# Altium PCB FPv1.3.1.PcbDoc (part 4 of 4)
Units mm, origin at the board's own origin, x right, y up, seen from the top; angles counter-clockwise.
Board outline 81.28 x 53.34 mm, 4 copper layers (Top Layer, GROUND PLANE, POWER PLANE, Bottom Layer); 98 components, 183 nets, 614 pads, 312 vias.
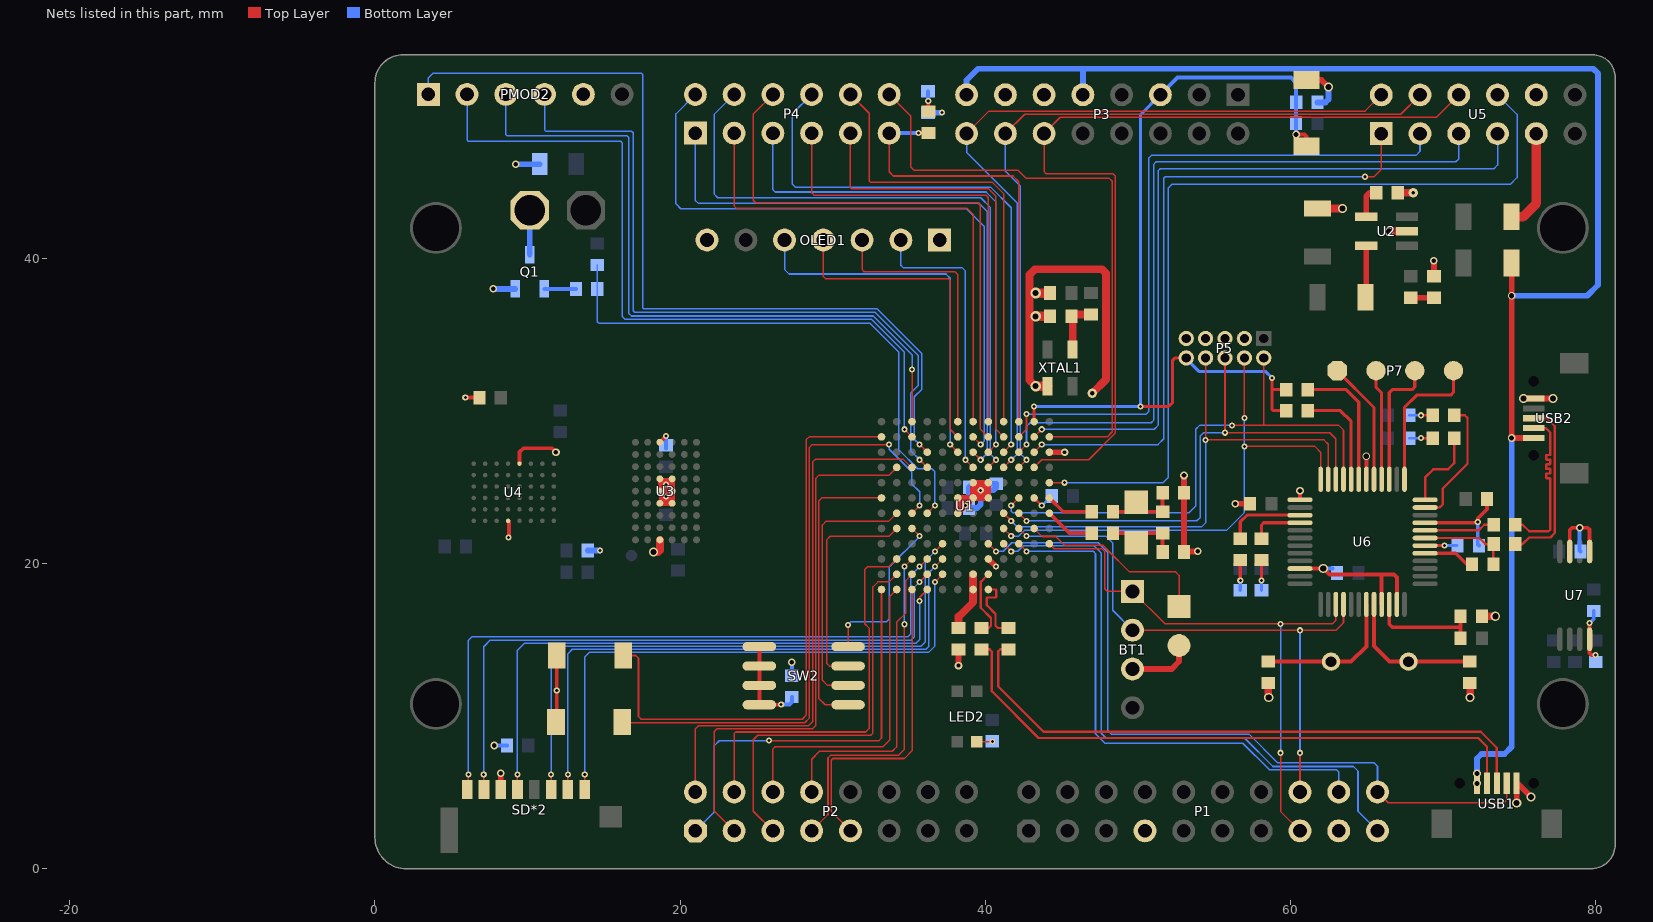
[diagram p6: the nets of this part, all layers, seen from the top]

## Via types
v1: diameter 0.403, hole 0.2, Top Layer to Bottom Layer, tented both sides, 261 vias
v2: diameter 0.503, hole 0.3, Top Layer to Bottom Layer, tented both sides, 25 vias
v3: diameter 0.6, hole 0.4, Top Layer to Bottom Layer, tented both sides, 11 vias
v4: diameter 0.508, hole 0.33, Top Layer to Bottom Layer, tented both sides, 5 vias
v5: diameter 0.703, hole 0.4, Top Layer to Bottom Layer, tented both sides, 3 vias
v6: diameter 0.603, hole 0.4, Top Layer to Bottom Layer, tented both sides, 2 vias
v7: diameter 0.503, hole 0.25, Top Layer to Bottom Layer, tented both sides, 2 vias
v8: diameter 0.6, hole 0.24, Top Layer to Bottom Layer, tented both sides, 1 vias
v9: diameter 0.508, hole 0.349, Top Layer to Bottom Layer, tented both sides, 1 vias
v10: diameter 0.603, hole 0.3, Top Layer to Bottom Layer, tented both sides, 1 vias

## Nets (pads, with @x,y where several pads share a name; then routed paths per layer and width w, separated by ;. In a path a pad name is that pad's centre, name@x,y a point inside that pad or via, vN(x,y) a via of type N, cw(c..) or ccw(c..) an arc to the next point about the centre after c; other vN are vias at no path point) (continued)
GND: BT1.3 C1.1 C2.1 C3.1 C4.1 C7.1 C8.2 C12.2 C13.1 C15.1 C16.1 C17.1 C18.1 C22.1 C24.2 C27.1 C28.1 C29.1 C32.2 C33.1 C34.1 C35.2 C36.1 C37.1 C38.1 OLED1.1 OLED1.7 P1.7 P1.17 P3.11 P3.13 P5.3 P5.5 P5.7 P5.9 P6.2 PMOD2.5 Q1.2 R6.1 R10.1 R30.1 R31.1 R34.1 S1.2 S2.2 S3.1 SD*2.6 U1.F6 U1.F7 U1.G7 U1.G8 U1.H3 U1.H7 U1.H8 U1.M10 U2.2 U3.A3 U3.D3 U3.D4 U3.E3 U3.E4 U3.F3 U3.F4 U3.J3 U4.D1 U4.E6 U5.9 U5.10 U6.9 U6.18 U6.25 U6.34 U6.45 U6.47 U7.5 U7.7 USB1.5 USB2.5 XTAL1.2 | length 133.7
  Top Layer w0.254: v1(5.925,30.875) C3.1@6.85,30.875 ; U4.E6@8.725,22.8 8.78,22.745 8.78,21.73 v1(8.75,21.7) ; U4.D1@9.475,26.55 9.475,27.304 9.726,27.556 11.611,27.556 v2(11.862,27.305) ; S2.2@11.916,9.675 S1.2@11.916,13.975 ; U3.F3@18.675,23.95 U3.F3@18.794,24.069 ; U3.D3@18.675,25.55 18.75,25.475 18.794,25.431 v1@19.075,25.15 ; U3.A3@18.675,27.95 v1(19.075,28.35) ; U3.E3@18.75,24.825 U3.E3@18.675,24.75 18.794,24.631 v1@19.075,24.35 ; U3.D4@19.356,25.431 U3.D4@19.475,25.55 ; U6.34@60.625,19.675 v3(62.15,19.675) 62.55,19.275 66.775,19.275 66.975,19.075 U6.47@66.975,17.325 ; U6.25@60.625,24.175 v2(60.625,24.775) ; U6.18@64.975,25.525 v9(64.975,27.025) ; U6.45@65.975,17.325 65.975,19.225 ; U6.9@68.825,22.675 72.25,22.675 72.275,22.7 v1(72.275,22.725) 72.275,22.948 72.887,23.561 C29.1@72.887,24.236 ; U7.7@78.304,20.791 78.304,22.204 78.45,22.35 v2(78.95,22.35) 79.475,22.35 79.604,22.221 U7.5@79.604,20.791
  Top Layer w0.381: SD*2.6@8.247,5.187 8.25,5.19 v2(8.25,6.25) v2@8.247,6.247 ; U3.F3@18.675,23.95 U3.F4@19.475,23.95 ; U3.D3@18.75,25.475 U3.E3@18.75,24.825 ; U3.E3@18.794,24.631 18.794,24.069 v1@19.075,24.35 ; U3.D3@18.794,25.431 19.356,25.431 v1@19.075,25.15 ; U3.D4@19.475,25.55 U3.E4@19.475,24.75 ; U1.F6@38.2,23.3 U1.F6@38.21,23.31 ; U1.F7@38.2,24.3 U1.F7@38.21,24.29 ; v7(38.25,13.312) R30.1@38.25,14.375 ; U1.H3@40.2,20.3 v1(40.7,19.8) ; U1.M10@44.2,27.3 v7(45.2,27.3) ; BT1.3@49.65,13.095 52.22,13.095 52.7,13.575 P6.2@52.7,14.635 ; v2(53.025,25.775) C38.1@53.025,20.765 53.06,20.8 v2(53.925,20.8) ; v2(56.375,23.925) C28.1@57.35,23.925 ; S3.1@61.05,51.691 62.025,51.691 v6(62.484,51.232) ; R31.1@69.4,38.825 v2(69.4,39.85) ; v3(74.825,4.3) USB1.5@74.825,5.6 ; USB1.5@74.875,5.6 v3(75.775,4.7) ; v3(75.275,30.825) USB2.5@75.95,30.825 v3(77.2,30.825) ; U3.E3@18.75,24.825 v1@19.075,25.15 ; U3.E3@18.75,24.825 18.825,24.75 U3.E4@19.475,24.75 ; v1@19.075,24.35 U3.E4@19.475,24.75 ; v1@19.075,24.35 U3.F4@19.475,23.95 ; v1@19.075,25.15 19.112,25.112 U3.E4@19.475,24.75 ; U3.F4@19.475,23.95 U3.E4@19.475,24.75 ; U1.F6@38.21,23.31 U1.F7@38.21,24.29 ; U1.F6@38.21,23.31 v1(38.7,23.8) ; U1.F7@38.21,24.29 U1.G7@39.19,24.29 ; U1.F7@38.21,24.29 v1(38.7,23.8) ; v1(38.7,23.8) U1.G7@39.19,24.29 ; U1.G7@39.19,24.29 U1.G7@39.2,24.3 ; U1.G7@39.19,24.29 39.2,24.29 U1.G7@39.2,24.3 ; U1.G7@39.2,24.3 U1.H7@40.2,24.3 ; U1.G7@39.2,24.3 U1.G8@39.2,25.3 ; U1.G7@39.2,24.3 v1(39.7,24.8) ; U1.G8@39.2,25.3 U1.H8@40.2,25.3 ; U1.G8@39.2,25.3 v1(39.7,24.8) ; v1(39.7,24.8) U1.H7@40.2,24.3 ; v1(39.7,24.8) U1.H8@40.2,25.3 ; U1.H7@40.2,24.3 U1.H8@40.2,25.3
  Top Layer w0.508: v3(18.25,20.75) 18.55,20.75 18.675,20.875 U3.J3@18.675,21.55 ; v5(43.3,31.625) 42.901,32.024 42.901,38.938 43.256,39.294 47.65,39.294 47.915,39.029 47.915,32.066 v10(47.015,31.166) ; C33.1@58.55,12.175 58.55,11.25 v3(58.575,11.225) ; C12.2@61.8,43.275 v3(63.4,43.275) ; v3(66.45,41.75) 66.475,41.775 U2.2@67.629,41.775 ; C13.1@67.025,44.3 v8(68.05,44.3) ; C35.2@71.75,12.175 71.775,12.15 v3(71.775,11.225) ; C24.2@72.55,16.55 v3(73.425,16.55)
  Top Layer w0.635: v5@42.977,37.725 C27.1@44.25,37.725 ; v5@43.002,36.2 C36.1@44.25,36.2 ; v5(43.3,31.625) XTAL1.2@44.074,31.625 ; C8.2@74.5,42.725 75.225,42.725 76.11,43.61 U5.9@76.11,48.175
  Bottom Layer w0.254: v2(7.825,8.075) C17.1@8.65,8.075 ; v1(19.075,25.175) v1@19.175,25.175 ; C15.1@19.075,27.55 v1(19.075,28.35) ; R6.1@27.325,12.65 v2(27.325,13.525) ; v3(62.15,19.675) C22.1@62.75,19.675 ; v1(72.275,22.725) 72.275,21.25 C32.2@72.35,21.175 ; v2(78.95,22.35) 78.95,20.845 C34.1@79.004,20.791
  Bottom Layer w0.381: v2(7.75,38) Q1.2@9.2,38 ; v2(9.225,46.175) C4.1@10.8,46.175 ; C16.1@13.95,20.85 v1@14.754,20.85 ; R34.1@36.25,49.55 v1@37.155,49.55 ; C2.1@39.121,24.8 v1(39.7,24.8) ; C7.1@61.775,50.225 62.29,50.225 62.484,50.419 v6(62.484,51.232) ; v1(39.7,24.8) 40.529,24.8 40.716,24.987 R10.1@40.716,25.236 39.17,25.236 C2.1@38.927,24.994 C1.1@38.927,23.647 39.472,23.647 39.7,23.876 v1(39.7,24.8)
  Bottom Layer w0.508: v1(19.075,24.4) v1@19.075,25.15
  other v1: 11.916,11.675 14.757,20.853 37.16,49.555
  other v5: 43.3,36.2 43.3,37.725
GPIOH0: P7.3 U6.15 | length 8.6
  Top Layer w0.203: U6.15@66.475,25.525 66.475,31.194 66.675,31.394 67.97,31.394 68.148,31.572 P7.3@68.148,32.639
GPIOH1: P7.4 U6.13 | length 9.8
  Top Layer w0.203: U6.13@67.475,25.525 67.475,30.239 68.275,31.039 70.51,31.039 70.688,31.217 P7.4@70.688,32.639
GPIOH2: L2.2 U6.12 | length 5.4
  Top Layer w0.152: U6.12@68.825,24.175 68.825,25.645 69.367,26.187 70.333,26.187 70.728,26.583 L2.2@70.728,28.219
GPIOH3: L6.2 U6.11 | length 8.5
  Top Layer w0.152: U6.11@68.825,23.675 69.776,23.675 69.977,23.876 69.977,24.917 71.603,26.543 71.603,29.54 71.425,29.718 L6.2@70.728,29.718
GPIOL0: R8.2 U6.20 | length 6.9
  Top Layer w0.203: R8.2@61.127,30.023 63.271,30.023 63.975,29.319 U6.20@63.975,25.525
GPIOL1: R11.2 U6.19 | length 8.7
  Top Layer w0.203: R11.2@61.127,31.394 63.652,31.394 64.475,30.572 U6.19@64.475,25.525
GPIOL2: P7.1 U6.17 | length 8.1
  Top Layer w0.203: P7.1@63.068,32.639 65.475,30.232 U6.17@65.475,25.525
GPIOL3: P7.2 U6.16 | length 7.3
  Top Layer w0.203: P7.2@65.608,32.639 65.608,31.547 65.975,31.18 U6.16@65.975,25.525
JTAG_TCK: P5.4 U1.J5 U6.24 | length 33.7
  Top Layer w0.102: U1.J5@41.2,22.3 v1(41.7,21.8) ; v1(56.98,27.675) 61.6,27.675 61.975,27.3 U6.24@61.975,25.525 ; v1(56.98,29.53) P5.4@56.98,33.48
  Bottom Layer w0.102: v1(41.7,21.8) 42.196,21.8 42.57,22.174 55.804,22.174 56.98,23.35 v1(56.98,27.675) v1(56.98,29.53)
JTAG_TDI: P5.8 U1.J6 U6.23 | length 35
  Top Layer w0.102: U1.J6@41.2,23.3 v1(41.7,22.8) ; P5.8@54.44,33.48 v1(54.44,28.1) 62.2,28.1 62.475,27.825 U6.23@62.475,25.525
  Bottom Layer w0.102: v1(41.7,22.8) 42.097,22.403 54.178,22.403 54.44,22.665 v1(54.44,28.1)
JTAG_TDO: P5.6 U1.K6 U6.22 | length 34.2
  Top Layer w0.102: U1.K6@42.2,23.3 v1(42.7,22.8) ; P5.6@55.71,33.48 v1(55.71,28.575) 62.575,28.575 62.975,28.175 U6.22@62.975,25.525
  Bottom Layer w0.102: v1(42.7,22.8) 53.864,22.8 54.086,23.022 54.086,28.356 54.305,28.575 v1(55.71,28.575) v1@55.725,28.575
JTAG_TMS: P5.2 U1.K7 U6.21 | length 36
  Top Layer w0.102: v1(41.7,23.8) U1.K7@42.2,24.3 ; v1(56.175,29.05) 58.25,29.05 ; P5.2@58.25,33.48 58.25,29.05 ; U6.21@63.475,25.525 63.475,28.75 63.175,29.05 58.25,29.05
  Bottom Layer w0.102: v1(41.7,23.8) 41.7,23.426 41.808,23.317 53.34,23.317 53.797,23.774 53.797,28.804 54.044,29.05 v1(56.175,29.05)
LPTMR0: P4.12 U1.M11 | length 39.6
  Top Layer w0.102: P4.12@33.701,50.745 35.125,49.321 35.125,45.975 35.325,45.775 42.15,45.775 42.688,45.237 48.133,45.237 48.322,45.049 48.322,28.634 47.988,28.3 U1.M11@44.2,28.3
N_RST: C7.2 P3.5 P5.10 R8.1 R11.1 R32.2 S3.2 U1.L12 | length 59.2
  Top Layer w0.203: U1.L12@43.2,29.3 v1(43.2,30.3) ; v1(50.175,30.3) 52.017,30.3 52.275,30.558 52.275,33.325 52.43,33.48 P5.10@53.17,33.48 ; 58.801,31.394 R11.1@59.727,31.394 ; v1(58.801,32.156) 58.801,30.099 58.877,30.023 R8.1@59.727,30.023
  Top Layer w0.254: v4(60.375,48.125) 60.925,48.125 61.05,48 S3.2@61.05,47.341
  Bottom Layer w0.203: v1(43.2,30.3) v1(50.175,30.3) 50.175,49.424 P3.5@51.476,50.725 ; P5.10@53.17,33.43 54,32.6 58.357,32.6 v1(58.801,32.156)
  Bottom Layer w0.254: P3.5@51.476,50.725 52.601,51.85 60.025,51.85 60.375,51.5 C7.2@60.375,50.225 v4(60.375,48.125)
NetC13_2: C13.2 U2.4 | length 1.7
  Top Layer w0.381: U2.4@64.971,42.725 64.971,44.071 65.2,44.3
NetC24_1: C24.1 R1.2 U6.46 | length 7.5
  Top Layer w0.254: U6.46@66.475,17.325 66.475,16.025 66.675,15.825 71.15,15.825 ; R1.2@71.15,15.1 C24.1@71.15,16.55
NetC32_1: C32.1 U6.6 | length 2.1
  Top Layer w0.203: U6.6@68.825,21.175 v1(70.1,21.175)
  Bottom Layer w0.203: v1(70.1,21.175) C32.1@70.925,21.175
NetC33_2: C33.2 U6.43 Y2.2 | length 9.6
  Top Layer w0.254: C33.2@58.55,13.575 63.975,13.575 64.975,14.575 U6.43@64.975,17.325
NetC35_1: C35.1 U6.44 Y2.1 | length 9.4
  Top Layer w0.254: U6.44@65.475,17.325 65.475,14.6 66.5,13.575 C35.1@71.75,13.575
NetC36_2: C36.2 FB2.2 XTAL1.4 | length 3.2
  Top Layer w0.508: XTAL1.4@45.725,34.025 C36.2@45.725,36.125 ; C36.2@45.775,36.325 FB2.2@46.925,36.325
NetC37_2: C37.2 R26.1 R27.1 Y1.1 | length 4.3
  Top Layer w0.254: R26.1@48.379,23.392 R27.1@51.424,23.392 ; R27.1@51.625,23.39 C37.2@51.625,24.64
NetC38_2: C38.2 R27.2 R28.1 Y1.2 | length 4.3
  Top Layer w0.254: R28.1@48.379,21.995 R27.2@51.427,21.995 ; C38.2@51.625,20.765 R27.2@51.625,21.99
NetF2_1: F2.1 U2.5 | length 3.4
  Top Layer w0.381: F2.1@64.971,37.45 U2.5@64.971,40.825
NetL1_2: L1.2 R34.2 | length 1.3
  Top Layer w0.254: L1.2@36.263,49.638 v1@36.263,50.288
  Bottom Layer w0.102: v1@36.25,50.326 v1(36.263,50.313)
  Bottom Layer w0.254: v1@36.25,50.326 R34.2@36.25,50.95
NetL2_1: L2.1 R12.1 | length 1.5
  Top Layer w0.152: v1(68.555,28.219) L2.1@69.328,28.219
  Bottom Layer w0.152: R12.1@67.781,28.219 v1(68.555,28.219)
NetL3_2: L3.2 R31.2 | length 1.5
  Top Layer w0.381: L3.2@67.875,37.425 R31.2@69.4,37.425
NetL4_1: L4.1 R18.1 | length 2
  Top Layer w0.203: v1(58.1,18.9) L4.1@58.1,20.225
  Bottom Layer w0.203: R18.1@58.1,18.247 v1(58.1,18.9)
NetL5_1: L5.1 R19.1 | length 2
  Top Layer w0.203: L5.1@56.709,20.229 56.709,18.931 v1@56.74,18.9
  Bottom Layer w0.203: R19.1@56.709,18.251 v1@56.709,18.896 ; v1(56.711,18.899) 56.713,18.9 v1@56.74,18.9
NetL6_1: L6.1 R13.1 | length 1.5
  Top Layer w0.152: v1(68.555,29.718) L6.1@69.328,29.718
  Bottom Layer w0.152: R13.1@67.781,29.718 v1(68.555,29.718)
NetLED2_2: LED2.2 R7.1 | length 1
  Top Layer w0.102: LED2.2@39.435,8.324 v1@40.462,8.324
  other v1: 40.462,8.331
NetLS2_2: LS2.2 Q1.1 | length 2.9
  Bottom Layer w0.381: Q1.1@10.15,40.25 LS2.2@10.149,43.15
NetQ1_2: Q1.3 R5.1 | length 2.1
  Bottom Layer w0.254: Q1.3@11.1,38 R5.1@13.175,38
NetR6_2: R6.2 SW2.1 SW2.2 SW2.3 SW2.4 | length 6.3
  Top Layer w0.254: SW2.1@25.192,14.555 SW2.2@25.192,13.285 SW2.3@25.192,12.015 SW2.4@25.192,10.745 v1@26.595,10.745
  Bottom Layer w0.254: v1(26.625,10.775) 27.175,10.775 27.325,10.925 R6.2@27.325,11.25
NetR22_2: R22.2 R25.2 U7.4 | length 3.3
  Top Layer w0.254: v1(79.6,16.1) 79.604,16.096 U7.4@79.604,15.041 79.604,14.121 79.725,14 v1(80,14)
  Bottom Layer w0.254: v1(79.6,16.1) 79.875,16.375 R25.2@79.875,16.9
NetR29_2: R29.2 U6.5 | length 3.4
  Top Layer w0.203: U6.5@68.825,20.675 70.825,20.675 71.55,19.95 R29.2@71.9,19.95
NetR30_2: R30.2 U1.G1 U1.G2 | length 3.9
  Top Layer w0.508: R30.2@38.25,15.775 38.25,16.525 39.2,17.475 U1.G1@39.2,18.3 U1.G2@39.2,19.3
PTA4: R9.2 U1.L7 | length 1.6
  Top Layer w0.152: U1.L7@43.2,24.3 v1(43.7,23.8)
  Bottom Layer w0.152: v1(43.7,23.8) 43.725,23.8 R9.2@44.35,24.425
PTA5: U1.M8 U5.8 | length 56
  Top Layer w0.102: U1.M8@44.2,25.3 v1(45.2,25.3)
  Bottom Layer w0.102: v1(45.2,25.3) 51.64,25.3 52,25.66 52,44.625 52.225,44.85 74.4,44.85 74.85,45.3 74.85,49.435 U5.8@73.57,50.715
PTA11: P3.12 U1.L9 U5.6 | length 58.6
  Top Layer w0.102: U1.L9@43.2,26.3 43.7,26.8 46.775,26.8 48.525,28.55 48.525,45.4 48.375,45.55 44,45.55 43.856,45.694 P3.12@43.856,48.185 44.921,49.25 69.565,49.25 U5.6@71.03,50.715
PTA12: P3.14 U1.K9 U5.4 | length 50.9
  Top Layer w0.102: P3.14@41.316,48.185 42.584,49.453 67.228,49.453 U5.4@68.49,50.715 ; U1.K9@42.2,26.3 v1(42.7,26.8)
  Bottom Layer w0.102: P3.14@41.316,48.185 41.316,45.725 42.291,44.75 42.291,27.209 v1(42.7,26.8)
PTA13: P3.16 U1.J9 U5.2 | length 51.8
  Top Layer w0.102: P3.16@38.776,48.185 40.247,49.656 64.891,49.656 U5.2@65.95,50.715 ; U1.J9@41.2,26.3 v1(41.7,26.8)
  Bottom Layer w0.102: P3.16@38.776,48.185 38.776,46.949 42.088,43.637 42.088,27.188 v1(41.7,26.8)
PTA14: U1.L10 U5.1 | length 42.8
  Top Layer w0.102: U1.L10@43.2,27.3 v1(43.7,27.8) ; v1(64.875,45.35) 65.475,45.35 65.95,45.825 U5.1@65.95,48.175
  Bottom Layer w0.102: v1(43.7,27.8) 51.325,27.8 51.7,28.175 51.7,45.248 51.802,45.35 v1(64.875,45.35)
PTA15: U1.L11 U5.7 | length 49.6
  Top Layer w0.102: U1.L11@43.2,28.3 v1(43.7,28.8)
  Bottom Layer w0.102: v1(43.7,28.8) 51.076,28.8 51.35,29.074 51.35,45.762 51.463,45.875 73.332,45.875 73.57,46.113 U5.7@73.57,48.175
PTA16: U1.K10 U5.5 | length 49
  Top Layer w0.102: U1.K10@42.2,27.3 v1(42.7,27.8)
  Bottom Layer w0.102: v1(42.7,27.8) 42.7,28.984 42.951,29.235 50.876,29.235 51.054,29.413 51.054,46.177 51.202,46.325 70.836,46.325 71.03,46.519 U5.5@71.03,48.175
PTA17: U1.K11 U5.3 | length 45.5
  Top Layer w0.102: U1.K11@42.2,28.3 42.7,28.8 v1(42.7,29.8)
  Bottom Layer w0.102: v1(42.7,29.8) 50.552,29.8 50.7,29.948 50.7,46.56 50.89,46.75 68.225,46.75 68.49,47.015 U5.3@68.49,48.175
PTA24: L1.1 P4.11 U1.K12 | length 29.6
  Top Layer w0.102: P4.11@33.701,48.205 33.701,45.674 33.975,45.4 41.825,45.4 42.2,45.025 U1.K12@42.2,29.3
  Top Layer w0.254: v1(35.625,48.225) L1.1@36.275,48.225
  Bottom Layer w0.254: P4.11@33.701,48.205 v1@35.605,48.205
PTA25: P4.10 U1.J12 | length 30.3
  Top Layer w0.102: P4.10@31.161,50.745 32.4,49.506 32.4,45.075 32.5,44.975 40.475,44.975 41.2,44.25 U1.J12@41.2,29.3
PTA26: P4.9 U1.J11 | length 29.3
  Top Layer w0.102: P4.9@31.161,48.205 31.161,44.633 31.244,44.55 40.225,44.55 40.7,44.075 40.7,28.8 U1.J11@41.2,28.3
PTA27: P4.8 U1.J10 | length 37.6
  Top Layer w0.102: U1.J10@41.2,27.3 v1(41.7,27.8)
  Bottom Layer w0.102: P4.8@28.621,50.745 27.35,49.474 27.35,44.875 27.55,44.675 40.35,44.675 41.7,43.325 v1(41.7,27.8)
PTA28: P4.7 U1.H12 | length 30.3
  Top Layer w0.102: P4.7@28.621,48.205 28.621,44.304 28.775,44.15 40.025,44.15 40.2,43.975 U1.H12@40.2,29.3
PTA29: P4.6 U1.H11 | length 37.9
  Top Layer w0.102: P4.6@26.081,50.745 24.8,49.464 24.8,43.805 24.955,43.65 39.5,43.65 39.675,43.475 39.675,28.825 U1.H11@40.2,28.3
PTB0: P4.5 U1.H10 | length 35.3
  Top Layer w0.102: U1.H10@40.2,27.3 v1(40.7,27.8)
  Bottom Layer w0.102: P4.5@26.081,48.205 26.081,44.494 26.225,44.35 40.05,44.35 40.7,43.7 v1(40.7,27.8)
PTB1: P4.4 U1.H9 | length 42.9
  Top Layer w0.102: U1.H9@40.2,26.3 v1(40.7,26.8)
  Bottom Layer w0.102: P4.4@23.541,50.745 22.225,49.429 22.225,44.225 22.475,43.975 39.7,43.975 40.335,43.34 40.335,27.165 v1(40.7,26.8)
PTB2: P4.3 U1.G12 | length 34.2
  Top Layer w0.102: P4.3@23.541,48.205 23.541,43.439 23.705,43.275 38.825,43.275 39.2,42.9 U1.G12@39.2,29.3
PTB3: P4.2 U1.G11 | length 43.6
  Top Layer w0.102: U1.G11@39.2,28.3 v1(39.7,27.8)
  Bottom Layer w0.102: P4.2@21.001,50.745 19.725,49.469 19.725,43.575 20.05,43.25 38.775,43.25 39.929,42.096 39.929,28.029 v1(39.7,27.8)
PTB4: P4.1 U1.G10 | length 41
  Top Layer w0.102: U1.G10@39.2,27.3 v1(39.7,26.8)
  Bottom Layer w0.102: P4.1@21.001,48.205 21.001,43.799 21.2,43.6 39.6,43.6 40.132,43.068 40.132,27.232 v1(39.7,26.8)
PTB5: OLED1.2 U1.G9 | length 19.1
  Top Layer w0.102: v1(38.7,26.8) U1.G9@39.2,26.3
  Bottom Layer w0.102: OLED1.2@34.468,41.199 34.468,39.548 34.616,39.4 38.475,39.4 38.7,39.175 v1(38.7,26.8)
PTB6: OLED1.3 U1.F12 | length 18
  Top Layer w0.102: OLED1.3@31.928,41.199 31.928,39.268 32.071,39.125 38.015,39.125 38.2,38.94 U1.F12@38.2,29.3
PTB7: OLED1.4 U1.F11 | length 21.3
  Top Layer w0.102: OLED1.4@29.388,41.199 29.388,38.811 29.524,38.675 37.576,38.675 37.7,38.551 37.7,28.8 U1.F11@38.2,28.3
PTB8: OLED1.5 U1.F10 | length 24.6
  Top Layer w0.102: v1(37.7,27.8) U1.F10@38.2,27.3
  Bottom Layer w0.102: OLED1.5@26.848,41.199 26.848,39.268 27.141,38.975 37.428,38.975 37.7,38.703 v1(37.7,27.8)
PTB20: PMOD2.1 U1.D10 | length 57.1
  Top Layer w0.102: v1(35.7,27.8) U1.D10@36.2,27.3
  Bottom Layer w0.102: PMOD2.1@3.5,50.75 3.5,51.825 3.8,52.125 17.471,52.125 17.55,52.046 17.55,36.755 17.605,36.7 32.896,36.7 35.846,33.75 35.846,31.426 35.346,30.926 35.346,28.154 v1(35.7,27.8)
PTB21: PMOD2.4 U1.D9 | length 47.7
  Top Layer w0.102: v1(35.7,26.8) U1.D9@36.2,26.3
  Bottom Layer w0.102: PMOD2.4@11.12,50.75 11.12,48.418 11.209,48.328 16.823,48.328 16.925,48.226 16.925,36.567 17.017,36.475 32.765,36.475 35.6,33.64 35.6,31.663 35.128,31.191 35.128,27.372 v1(35.7,26.8)
PTB22: PMOD2.3 U1.C12 | length 46.4
  Top Layer w0.102: U1.C12@35.2,29.3 v1(35.2,32.72)
  Bottom Layer w0.102: PMOD2.3@8.58,50.75 8.58,48.113 8.668,48.025 16.542,48.025 16.625,47.942 16.625,36.41 16.81,36.225 32.66,36.225 35.2,33.685 v1(35.2,32.72)
PTB23: PMOD2.2 U1.C11 | length 49.8
  Top Layer w0.102: v1(34.7,28.8) U1.C11@35.2,28.3
  Bottom Layer w0.102: PMOD2.2@6.04,50.75 6.04,47.757 6.122,47.675 16.104,47.675 16.2,47.579 16.2,36.2 16.4,36 32.555,36 34.7,33.855 v1(34.7,28.8)
PTC3: S1.1 U1.A11 | length 39.1
  Top Layer w0.102: S1.1@16.266,13.975 17.1,13.975 17.275,13.8 17.275,9.975 17.45,9.8 28,9.8 28.275,10.075 28.275,28.123 28.452,28.3 U1.A11@33.2,28.3
PTC12: SW2.5 U1.A7 | length 19.2
  Top Layer w0.102: SW2.5@31.008,10.745 29.505,10.745 29.088,11.162 29.088,24.103 29.285,24.3 U1.A7@33.2,24.3
PTC13: R4.2 R5.2 U1.D6 | length 36.6
  Top Layer w0.102: U1.D6@36.2,23.3 v1(36.7,23.8)
  Bottom Layer w0.102: R4.2@14.575,39.575 14.575,35.844 14.681,35.738 32.461,35.738 34.315,33.884 34.315,27.472 35.575,26.213 36.5,26.213 36.7,26.013 v1(36.7,23.8)
PTC14: S2.1 U1.C6 | length 41
  Top Layer w0.102: S2.1@16.216,9.572 28.172,9.572 28.478,9.878 28.478,27.615 28.664,27.8 v1(33.7,27.8) v1@33.706,27.8 ; U1.C6@35.2,23.3 v1(35.7,23.8)
  Bottom Layer w0.102: v1(33.7,27.8) 33.7,27.489 35.179,26.01 35.179,25.222 35.7,24.701 v1(35.7,23.8)
PTC15: SW2.6 U1.B6 | length 17.2
  Top Layer w0.102: SW2.6@31.008,12.015 29.66,12.015 29.325,12.35 29.325,22.53 29.579,22.784 33.684,22.784 U1.B6@34.2,23.3
PTC18: SW2.8 U1.C5 | length 11.3
  Top Layer w0.102: SW2.8@31.008,14.555 v1(31.008,15.982) ; U1.C5@35.2,22.3 v1(35.7,21.8)
  Bottom Layer w0.102: v1(31.008,15.982) 31.223,16.197 33.545,16.197 33.706,16.358 33.706,19.787 35.7,21.781 v1(35.7,21.8)
PTC19: SW2.7 U1.B5 | length 14.5
  Top Layer w0.102: SW2.7@31.008,13.285 29.79,13.285 29.6,13.475 29.6,21.547 29.846,21.793 33.693,21.793 U1.B5@34.2,22.3
PTD7: P2.1 U1.A1 | length 27
  Top Layer w0.102: v1(25.832,8.396) 33.034,8.396 33.2,8.562 U1.A1@33.2,18.3
  Bottom Layer w0.102: P2.1@21.001,2.485 22.25,3.734 22.25,8.077 22.569,8.396 v1(25.832,8.396)
PTD8: P2.2 U1.C9 | length 35.8
  Top Layer w0.102: P2.2@21.001,5.025 21.001,9.165 21.205,9.369 28.419,9.369 28.681,9.631 28.681,26.649 28.857,26.825 34.638,26.825 35.163,26.3 U1.C9@35.2,26.3
PTD9: P2.3 U1.B9 | length 35.7
  Top Layer w0.102: P2.3@23.541,2.485 22.25,3.776 22.25,9.017 22.399,9.165 28.665,9.165 28.885,9.385 28.885,25.583 29.077,25.775 33.675,25.775 U1.B9@34.2,26.3
PTD10: P2.4 U1.B3 | length 25.7
  Top Layer w0.102: P2.4@23.541,5.025 23.541,8.86 23.643,8.962 32.162,8.962 32.385,9.185 32.385,15.773 32.107,16.051 32.107,19.61 32.297,19.8 33.7,19.8 U1.B3@34.2,20.3
PTD11: P2.5 U1.B2 | length 26
  Top Layer w0.102: P2.5@26.081,2.485 24.79,3.776 24.79,8.458 25.082,8.75 32.499,8.75 32.639,8.89 32.639,18.466 32.969,18.796 33.696,18.796 U1.B2@34.2,19.3
PTD12: P2.6 U1.B1 | length 20.8
  Top Layer w0.102: P2.6@26.081,5.025 26.081,7.844 26.237,8 33.298,8 33.744,8.445 33.744,17.844 U1.B1@34.2,18.3
PTD13: P2.7 U1.C3 | length 23.1
  Top Layer w0.102: P2.7@28.621,2.485 29.693,3.557 29.693,7.264 29.856,7.428 34.29,7.428 34.7,7.838 v1(34.7,16.024) ; v1(34.7,19.8) U1.C3@35.2,20.3
  Bottom Layer w0.102: v1(34.7,16.024) v1(34.7,19.8)
PTD14: P2.8 U1.C2 | length 19.8
  Top Layer w0.102: P2.8@28.621,5.025 28.621,7.183 29.134,7.696 33.909,7.696 34.188,7.976 34.188,16.154 34.798,16.764 34.798,18.898 U1.C2@35.2,19.3
PTD15: P2.9 U1.C1 | length 21.3
  Top Layer w0.102: P2.9@31.161,2.485 29.9,3.746 29.9,7.116 30.009,7.225 34.7,7.225 35.2,7.725 U1.C1@35.2,18.3
PTE0: SD*2.8 U1.D3 | length 44.2
  Top Layer w0.102: SD*2.8@6.125,5.265 v1(6.125,6.175) ; v1(35.7,19.8) U1.D3@36.2,20.3
  Bottom Layer w0.102: v1(6.125,6.175) 6.125,14.975 6.341,15.191 34.927,15.191 35.103,15.367 35.103,19.203 v1(35.7,19.8)
PTE1: SD*2.7 U1.D2 | length 42.4
  Top Layer w0.102: SD*2.7@7.129,5.205 v1(7.129,6.175) ; v1(35.7,18.8) U1.D2@36.2,19.3
  Bottom Layer w0.102: v1@7.125,6.325 v1@7.129,6.321 ; v1(7.129,6.175) v1@7.129,6.321 ; v1@35.8,18.9 35.331,18.431 35.331,15.168 35.151,14.988 7.563,14.988 7.129,14.554 v1@7.129,6.321
PTE2: SD*2.5 U1.D1 | length 39.3
  Top Layer w0.102: SD*2.5@9.336,5.198 v1(9.336,6.175) ; v1(35.7,17.551) 35.7,17.8 U1.D1@36.2,18.3
  Bottom Layer w0.102: v1(9.336,6.175) 9.336,14.311 9.81,14.785 35.46,14.785 35.7,15.024 v1(35.7,17.551)
PTE3: SD*2.3 U1.E4 | length 40.6
  Top Layer w0.102: SD*2.3@11.543,5.191 v1(11.543,6.175) ; v1(36.7,20.8) U1.E4@37.2,21.3
  Bottom Layer w0.102: v1(11.543,6.175) 11.543,14.293 11.831,14.581 35.79,14.581 36.068,14.859 36.068,20.168 v1@36.6,20.7
PTE4: SD*2.2 U1.E3 | length 38.9
  Top Layer w0.102: SD*2.2@12.647,5.187 v1(12.646,6.175) ; v1(36.7,19.8) U1.E3@37.2,20.3
  Bottom Layer w0.102: v1(12.646,6.175) 12.646,14.096 12.928,14.378 36.117,14.378 36.297,14.557 36.297,19.397 v1(36.7,19.8)
PTE5: SD*2.1 U1.E2 | length 36.8
  Top Layer w0.102: SD*2.1@13.75,5.19 v1(13.75,6.175) ; v1(36.7,18.8) U1.E2@37.2,19.3
  Bottom Layer w0.102: v1(13.75,6.175) 13.75,13.875 14.05,14.175 36.273,14.175 36.7,14.602 v1(36.7,18.8)
PTE24: BT1.1 P1.15 U1.M4 U6.39 | length 37.6
  Top Layer w0.102: U1.M4@44.2,21.3 44.522,20.978 47.647,20.978 47.829,20.796 47.829,18.346 48,18.175 BT1.1@49.65,18.175 51.775,16.05 62.75,16.05 62.975,16.275 U6.39@62.975,17.325 ; v1(59.35,7.6) 59.35,3.76 P1.15@60.625,2.485
  Bottom Layer w0.102: v1(59.35,7.6) v1(59.35,16.05)
PTE25: BT1.2 P1.16 U1.K5 U6.40 | length 38.7
  Top Layer w0.102: U1.K5@42.2,22.3 v1(42.7,21.8) ; BT1.2@49.65,15.46 49.825,15.635 62.985,15.635 63.475,16.125 U6.40@63.475,17.325 ; P1.16@60.625,5.025 v1(60.625,7.6)
  Bottom Layer w0.102: v1(42.7,21.8) 47.898,21.8 48.35,21.348 48.35,16.935 BT1.2@49.65,15.635 ; v1(60.625,7.6) v1(60.625,15.625)
PTE26: P1.18 U1.K4 | length 35.4
  Top Layer w0.102: U1.K4@42.2,21.3 v1(42.7,20.8)
  Bottom Layer w0.102: v1(42.7,20.8) 47.081,20.8 47.225,20.656 47.225,8.85 47.85,8.225 56.875,8.225 58.603,6.497 63.003,6.497 63.165,6.335 P1.18@63.165,5.025
PTE27: P1.19 U1.J4 | length 41.1
  Top Layer w0.102: U1.J4@41.2,21.3 v1(41.7,20.8)
  Bottom Layer w0.102: v1(41.7,20.8) 42.136,20.8 42.49,21.154 47.138,21.154 47.6,20.692 47.6,8.875 47.925,8.55 57,8.55 58.85,6.7 64.125,6.7 64.425,6.4 64.425,3.765 P1.19@65.705,2.485
PTE28: P1.20 U1.H4 USB1.4 | length 51.2
  Top Layer w0.102: U1.H4@40.2,21.3 v1(40.7,20.8) ; P1.20@65.705,5.025 66.405,4.325 74,4.325 74.175,4.5 USB1.4@74.175,5.6 ; USB1.4@74.15,5.6 74.15,6.3
  Bottom Layer w0.102: v1(40.7,20.8) 41.171,20.8 41.728,21.357 47.401,21.357 48.025,20.733 48.025,9.05 48.25,8.825 57.275,8.825 59.15,6.95 65.475,6.95 65.705,6.72 P1.20@65.705,5.025
RTC_WAKE: P6.1 U1.L5 | length 12.8
  Top Layer w0.102: U1.L5@43.2,22.3 43.725,21.775 44.625,21.775 45.2,21.2 47.712,21.2 48.032,20.88 48.032,20.868 49.425,19.475 52.45,19.475 52.7,19.225 P6.1@52.7,17.175
RTCX1: R28.2 U1.M6 | length 3.3
  Top Layer w0.254: U1.M6@44.2,23.3 45.505,21.995 R28.2@46.979,21.995
RTCX2: R26.2 U1.M7 | length 3.2
  Top Layer w0.254: U1.M7@44.2,24.3 45.108,23.392 R26.2@46.979,23.392
RXD_LED: L4.2 U6.28 | length 3.5
  Top Layer w0.203: L4.2@58.1,21.625 58.1,22.525 58.25,22.675 U6.28@60.625,22.675
TXD_LED: L5.2 U6.27 | length 5.2
  Top Layer w0.203: L5.2@56.709,21.629 56.709,22.734 57.15,23.175 U6.27@60.625,23.175
USB0D_N: R20.2 U6.8 | length 4.7
  Top Layer w0.152: U6.8@68.825,22.175 72.325,22.175 72.7,22.55 R20.2@73.325,22.55
  Top Layer w0.203: R20.2@73.275,22.55 R20.2@73.325,22.5
USB0D_P: R21.2 R29.1 U6.7 | length 6
  Top Layer w0.152: U6.7@68.825,21.675 72.375,21.675 72.775,21.275 R21.2@73.325,21.275 ; R21.2@73.3,21.25 R29.1@73.3,19.95 R29.1@73.325,19.975
USB0R_N: R20.1 USB2.2 | length 11.4
  Top Layer w0.152: R20.1@74.725,22.55 75.212,22.55 75.646,22.116 76.916,22.116 77.02,22.22 77.02,25.55 77.02,25.563 ccw(c76.99,25.563) 76.99,25.594 76.797,25.594 cw(c76.797,25.624) 76.766,25.624 76.766,25.868 cw(c76.797,25.868) 76.797,25.899 76.99,25.899 ccw(c76.99,25.929) 77.02,25.929 77.02,26.173 ccw(c76.99,26.173) 76.99,26.203 76.797,26.203 cw(c76.797,26.234) 76.766,26.234 76.766,26.478 cw(c76.797,26.478) 76.797,26.508 76.99,26.508 ccw(c76.99,26.539) 77.02,26.539 77.02,26.783 ccw(c76.99,26.783) 76.99,26.813 76.797,26.813 cw(c76.797,26.843) 76.766,26.843 76.766,27.087 cw(c76.797,27.087) 76.797,27.118 76.99,27.118 ccw(c76.99,27.148) 77.02,27.148 77.02,27.423 77.02,27.575 77.02,28.58 76.725,28.875 USB2.2@75.95,28.875
USB0R_P: R21.1 USB2.3 | length 11.5
  Top Layer w0.152: R21.1@74.725,21.275 75.212,21.275 75.646,21.709 77.034,21.709 77.325,22 77.325,29 76.8,29.525 USB2.3@75.95,29.525
USB1D_N: R2.1 U1.H2 | length 4.5
  Top Layer w0.152: R2.1@39.75,15.775 40.225,15.775 40.375,15.925 40.375,16.425 39.7,17.1 39.7,18.8 U1.H2@40.2,19.3
USB1D_P: R3.1 U1.H1 | length 4.6
  Top Layer w0.152: U1.H1@40.2,18.3 40.675,18.3 40.725,18.25 40.725,17.825 40.675,17.775 40.15,17.775 40.106,17.731 40.106,17.269 40.675,16.7 40.675,15.925 40.825,15.775 R3.1@41.525,15.775
USBPD_N: R2.2 USB1.2 | length 39.7
  Top Layer w0.152: R2.2@39.75,14.375 40.285,14.375 40.434,14.226 40.434,11.632 43.497,8.569 72.307,8.569 72.875,8 USB1.2@72.875,5.6
USBPD_P: R3.2 USB1.3 | length 39.7
  Top Layer w0.152: R3.2@41.525,14.375 40.985,14.375 40.841,14.23 40.841,11.959 43.825,8.975 72.475,8.975 73.525,7.925 USB1.3@73.525,5.6
VCC: F1.1 P3.9 P3.15 USB1.1 USB2.1 | length 101.6
  Top Layer w0.381: F1.1@74.5,39.7 v4(74.5,28.225) USB2.1@75.95,28.225
  Bottom Layer w0.381: P3.15@38.776,50.725 38.776,51.676 39.525,52.425 79.85,52.425 80.15,52.125 80.15,38.25 79.45,37.55 v4(74.5,37.55) ; P3.9@46.396,50.725 46.396,52.396 ; v4(72.225,5.6) v4(72.225,6.25) 72.225,7.225 72.525,7.525 74.025,7.525 74.5,8 v4(74.5,28.225)
pads on no net: P3.1 SD*2.0 U1.A10 U1.B10 U1.C10 U1.M5 U3.A2 U3.A5 U3.B3 U3.B4 U3.H3 U3.H4 U3.J2 U3.J5 U4.E3 U4.H6 U6.29 U6.30 U6.32 U6.33 U6.35 U6.36 U6.37 U6.38 U6.41 USB1.0 USB1.6 USB1.7 USB2.0 USB2.4 USB2.6 USB2.7 XTAL1.1

## Polygon pours and split planes (outlines as drawn)
GND on GROUND PLANE (split plane): 1.84,52.83 79.81,52.83 79.822,52.831 79.936,52.823 80.059,52.799 80.178,52.758 80.291,52.703 80.395,52.633 80.49,52.55 80.573,52.455 80.643,52.351 80.698,52.238 80.739,52.119 80.763,51.996 80.771,51.882 80.77,51.87 80.77,1.58 80.771,1.567 80.763,1.44 80.735,1.303 80.69,1.17 80.628,1.044 80.55,0.928 80.458,0.822 80.352,0.73 80.236,0.652 80.11,0.59 79.977,0.545 79.84,0.517 79.713,0.509 79.7,0.51 2.05,0.51 2.035,0.509 1.877,0.518 1.707,0.547 1.541,0.595 1.381,0.661 1.23,0.744 1.089,0.845 0.96,0.96 0.845,1.089 0.744,1.23 0.661,1.381 0.595,1.541 0.547,1.707 0.518,1.877 0.509,2.035 0.51,2.05 0.51,51.5 0.509,51.513 0.517,51.649 0.542,51.796 0.583,51.94 0.64,52.078 0.713,52.208 0.799,52.33 0.898,52.442 1.01,52.541 1.132,52.627 1.262,52.7 1.4,52.757 1.544,52.798 1.691,52.823 1.827,52.831
3.3V on POWER PLANE (split plane): 1.84,52.83 79.81,52.83 79.822,52.831 79.936,52.823 80.059,52.799 80.178,52.758 80.291,52.703 80.395,52.633 80.49,52.55 80.573,52.455 80.643,52.351 80.698,52.238 80.739,52.119 80.763,51.996 80.771,51.882 80.77,51.87 80.77,1.58 80.771,1.567 80.763,1.44 80.735,1.303 80.69,1.17 80.628,1.044 80.55,0.928 80.458,0.822 80.352,0.73 80.236,0.652 80.11,0.59 79.977,0.545 79.84,0.517 79.713,0.509 79.7,0.51 2.05,0.51 2.035,0.509 1.877,0.518 1.707,0.547 1.541,0.595 1.381,0.661 1.23,0.744 1.089,0.845 0.96,0.96 0.845,1.089 0.744,1.23 0.661,1.381 0.595,1.541 0.547,1.707 0.518,1.877 0.509,2.035 0.51,2.05 0.51,51.5 0.509,51.513 0.517,51.649 0.542,51.796 0.583,51.94 0.64,52.078 0.713,52.208 0.799,52.33 0.898,52.442 1.01,52.541 1.132,52.627 1.262,52.7 1.4,52.757 1.544,52.798 1.691,52.823 1.827,52.831

## Keep-outs
Keep-Out Layer:
  the board outline again, w0.254

## Other copper
Top Layer:
  rectangle net 3.3V: 60.884,36.576 62.636,40.615
  rectangle net 3.3V: 37.2,22.306 37.7,25.3
  rectangle net 3.3V: 37.2,25.07 37.97,25.3
  rectangle net GND: 39.2,24.3 40.2,25.3
  rectangle net GND: 38.21,23.724 40.03,24.841
Bottom Layer:
  rectangle net GND: 38.837,24.8 40.529,25.248
  rectangle net 3.3V: 37.135,21.565 37.922,24.562
  rectangle net 3.3V: 37.135,21.514 38.456,22.428
  rectangle net GND: 38.532,23.647 39.7,24.663

## Silkscreen, mask and mechanical layers (free items; w line width, h text height)
Top Overlay:
  drawing of 2913 lines, arcs and shapes, not listed
  text "GND" at 63.2,51.2 h0.51 r90
  text ">" at 36.013,48.838 h0.76 r270
  text "B20" at 2.769,48.209 h1.02
  text "B23" at 5.339,48.209 h1.02
  text "B22" at 7.91,48.209 h1.02
  text "B21" at 10.48,48.209 h1.02
  text "GND" at 13.051,48.213 h1.02
  text "3V3" at 15.621,48.213 h1.02
  text "RST" at 63.2,47.05 h0.51 r90
  text "A13" at 65.253,46.025 h1.02
  text "A12" at 67.828,46.021 h1.02
  text "A11" at 70.404,46.025 h1.02
  text "A5" at 72.98,46.025 h1.02
  text "GND" at 75.555,46.025 h1.02
  text "3V3" at 78.13,46.025 h1.02
  text "B3" at 20.371,45.775 h1.02
  text "B1" at 22.939,45.776 h1.02
  text "A29" at 25.507,45.771 h1.02
  text "A27" at 28.076,45.771 h1.02
  text "A25" at 30.644,45.771 h1.02
  text "A19" at 33.212,45.772 h1.02
  text "VCC" at 38,45.772 h1.02
  text "GND" at 40.641,45.772 h1.02
  text "GND" at 43.283,45.772 h1.02
  text "VCC" at 45.924,45.772 h1.02
  text "3V3" at 48.565,45.772 h1.02
  text "RST" at 51.207,45.772 h1.02
  text "3V3" at 53.848,45.772 h1.02
  text "NC" at 56.49,45.772 h1.02
  text "A14" at 65.253,45.009 h1.02
  text "A17" at 67.828,45.009 h1.02
  text "A16" at 70.404,45.009 h1.02
  text "A15" at 72.98,45.009 h1.02
  text "GND" at 75.555,45.009 h1.02
  text "3V3" at 78.13,45.009 h1.02
  text "B4" at 20.371,44.557 h1.02
  text "B2" at 22.931,44.552 h1.02
  text "B0" at 25.491,44.553 h1.02
  text "A28" at 28.052,44.552 h1.02
  text "A26" at 30.612,44.552 h1.02
  text "A24" at 33.172,44.552 h1.02
  text "A13" at 38.028,44.558 h1.02
  text "A12" at 40.66,44.552 h1.02
  text "A11" at 43.292,44.552 h1.02
  text "A10" at 45.924,44.559 h1.02
  text "A9" at 48.556,44.56 h1.02
  text "A8" at 51.188,44.56 h1.02
  text "A7" at 53.82,44.552 h1.02
  text "A6" at 56.452,44.56 h1.02
  text "+" at 71.4,44.05 h0.51 r90
  text "470P" at 64.618,43.637 h0.51 r90
  text "10uF" at 72.225,42.525 h0.86
  text "2.2uF" at 61.975,40.925 h0.76 r90
  text "+" at 60.25,40.525 h0.51
  text "3.3V" at 64.475,39.775 h0.51
  text "3.3V" at 60.45,39.475 h0.51 r90
  text "F" at 72.825,39.475 h0.86
  text "GND" at 21.26,39.021 h0.86
  text "3V3" at 23.8,39.021 h0.86
  text "B8" at 26.34,39.021 h0.86
  text "B7" at 28.88,39.014 h0.86
  text "B6" at 31.42,39.021 h0.86
  text "B5" at 33.96,39.022 h0.86
  text "GND" at 36.5,39.021 h0.86
  text "105" at 45.2,38.8 h0.51 r180
  text ">" at 67.65,38.3 h0.76 r270
  text "DDK" at -12.941,37.3 h1.27
  text "F" at 63.2,37.15 h0.86
  text "FB" at 47.825,36.75 h0.51 r90
  text "3.3V" at 57.75,36.025 h0.76
  text "1K" at 69.037,35.839 h0.86
  text "104" at 45.275,35.4 h0.51 r180
  text "人民满意，世人仰慕！" at -15.516,35.35 h1.27
  text "L2" at 62.687,34.315 h0.86
  text "L3" at 65.219,34.32 h0.86
  text "H0" at 67.75,34.32 h0.86
  text "H1" at 70.282,34.315 h0.86
  text "0R" at 59.995,32.182 h0.86
  text "GND" at 42.625,32.1 h0.51 r270
  text "L1" at 62.205,30.531 h0.86
  text "104" at 7.2,29.85 h0.51
  text "L0" at 62.23,29.667 h0.86
  text ">" at 69.926,28.677 h0.86
  text "1K" at 59.969,28.499 h0.86
  text "12P" at 51.925,25.44 h0.51
  text "104" at 71.862,24.986 h0.51
  text "104" at 57.475,24.625 h0.51
  text "0R" at 47.676,24.105 h0.64
  text "1M" at 52.675,22.34 h0.51 r90
  text "27R" at 75.8,21.425 h0.51 r90
  text ">" at 56.85,20.825 h0.51 r90
  text ">" at 58.25,20.825 h0.51 r90
  text "0R" at 47.676,20.803 h0.64
  text "12P" at 52.025,19.615 h0.51
  text "1.5K" at 71.075,19.55 h0.51 r90
  text "E24" at 47.76,17.729 h0.86 r90
  text "RTC" at 54.915,16.612 h0.86 r90
  text "104" at 74.325,16.3 h0.51 r90
  text "E25" at 47.752,15.172 h0.86 r90
  text "470R" at 73.65,14.6 h0.51 r90
  text "10K" at 37.414,14.554 h0.64 r90
  text "C18" at 32.741,14.3 h0.64
  text "GND" at 54.915,14.021 h0.86 r90
  text "C3" at 17.856,13.691 h0.86
  text "0R" at 40.208,13.31 h0.51
  text "0R" at 41.3,13.31 h0.51
  text "C19" at 32.741,13.039 h0.64
  text "GND" at 47.753,12.614 h0.86 r90
  text "27P" at 57.625,12.5 h0.51 r90
  text "27P" at 72.875,12.5 h0.51 r90
  text "6MHZ" at 64.275,12.25 h0.76
  text "GND" at 23.647,12.192 h0.64 r90
  text "C15" at 32.741,11.778 h0.64
  text "C12" at 32.741,10.516 h0.64
  text "5V" at 47.752,10.058 h0.86 r90
  text "C14" at 17.755,9.398 h0.86
  text "D8" at 20.625,7.874 h0.86
  text "D10" at 23.135,7.873 h0.86
  text "D12" at 25.646,7.867 h0.86
  text "D14" at 28.156,7.867 h0.86
  text "E6" at 30.666,7.874 h0.86
  text "E8" at 33.177,7.874 h0.86
  text "E10" at 35.687,7.874 h0.86
  text "ADC" at 42.139,7.874 h0.86
  text "ADC" at 44.688,7.874 h0.86
  text "ADC" at 47.238,7.874 h0.86
  text "ADC" at 49.787,7.874 h0.86
  text "ADC" at 52.337,7.874 h0.86
  text "ADC" at 54.887,7.874 h0.86
  text "DAC" at 57.436,7.874 h0.86
  text "E25" at 59.986,7.875 h0.86
  text "E26" at 62.535,7.874 h0.86
  text "E28" at 65.085,7.874 h0.86
  text "冲浪V1.3" at 1.575,7.8 h1.27 r270
  text "+" at 39.929,7.061 h0.86 r90
  text "E0" at 5.74,6.949 h0.86
  text "GND" at 8.532,6.96 h0.76 r90
  text "3V3" at 10.725,6.96 h0.86 r90
  text "E3" at 11.22,6.948 h0.86
  text "E5" at 13.411,6.95 h0.86
  text "E1" at 6.836,6.943 h0.86
  text "E2" at 9.028,6.943 h0.86
  text "E4" at 12.315,6.943 h0.86
  text "D7" at 20.625,6.648 h0.86
  text "D9" at 23.135,6.655 h0.86
  text "D11" at 25.646,6.648 h0.86
  text "D13" at 28.156,6.653 h0.86
  text "D15" at 30.666,6.656 h0.86
  text "E7" at 33.177,6.648 h0.86
  text "E9" at 35.687,6.655 h0.86
  text "ADC" at 42.139,6.655 h0.86
  text "ADC" at 44.687,6.655 h0.86
  text "ADC" at 47.236,6.655 h0.86
  text "ADC" at 49.784,6.655 h0.86
  text "ADC" at 52.332,6.655 h0.86
  text "ADC" at 54.881,6.655 h0.86
  text "DAC" at 57.429,6.655 h0.86
  text "E24" at 59.978,6.648 h0.86
  text "GND" at 62.526,6.655 h0.86
  text "E27" at 65.075,6.648 h0.86
  text "E12" at 40.894,4.496 h0.86 r90
  text "E11" at 40.89,2.057 h0.86 r90
Bottom Overlay:
  lines w0.254: 12.141,18.669 14.427,18.669 ; 12.141,20.117 14.453,20.117 ; 12.141,21.514 14.376,21.514
  text "1k" at 36.025,51.725 h0.76 r270
  text "104" at 59.275,49.9 h0.51 r270
  text "10K" at 59.25,48.575 h0.51 r270
  text "C" at 12.217,45.822 h1.02
  text "10K" at 15.977,40.869 h0.86 r90
  text "NPN" at 10.795,38.786 h1.02
  text "1K" at 14.275,36.601 h0.86
  text "10K" at 12.573,30.734 h0.51
  text "1K" at 65.583,28.702 h0.86
  text "104" at 18.449,27.353 h0.51 r90
  text "104" at 36.855,24.943 h0.64 r90
  text "0R" at 42.443,24.892 h0.64 r90
  text "104" at 18.449,23.975 h0.51 r90
  text "33nF" at 72.3,21.875 h0.76
  text "c" at 78.511,21.717 h0.86
  text "FB" at 39.345,20.904 h0.64
  text "10K" at 7.075,20.775 h0.51 r270
  text "104" at 11.35,20.6 h0.51
  text "100R" at 20.98,20.549 h0.51 r90
  text "104" at 64.15,20.2 h0.76
  text "10K" at 11.354,19.228 h0.51
  text "2.2K" at 79.15,17.95 h0.51 r90
  text "2K" at 57.8,17.075 h0.76
  text "10K" at 76.2,13.9 h0.51 r270
  text "1R" at 28.499,12.268 h0.64 r90
  text "500R" at 41.631,9.677 h0.64 r90
  text "104" at 9.65,7 h0.51
Mechanical 1:
  lines w0.102: 32.2,23.825 45.2,23.825 ; 38.7,17.3 38.7,30.3